# Altium PCB inverter_2EDF7275K.PcbDoc
Units mm, origin at the board's own origin, x right, y up, seen from the top; angles counter-clockwise.
Board outline 100 x 80.04 mm, 2 copper layers (Top Layer, Bottom Layer); 57 components, 34 nets, 190 pads, 17 vias.
Unrouted connection lines stored in the file: 42.
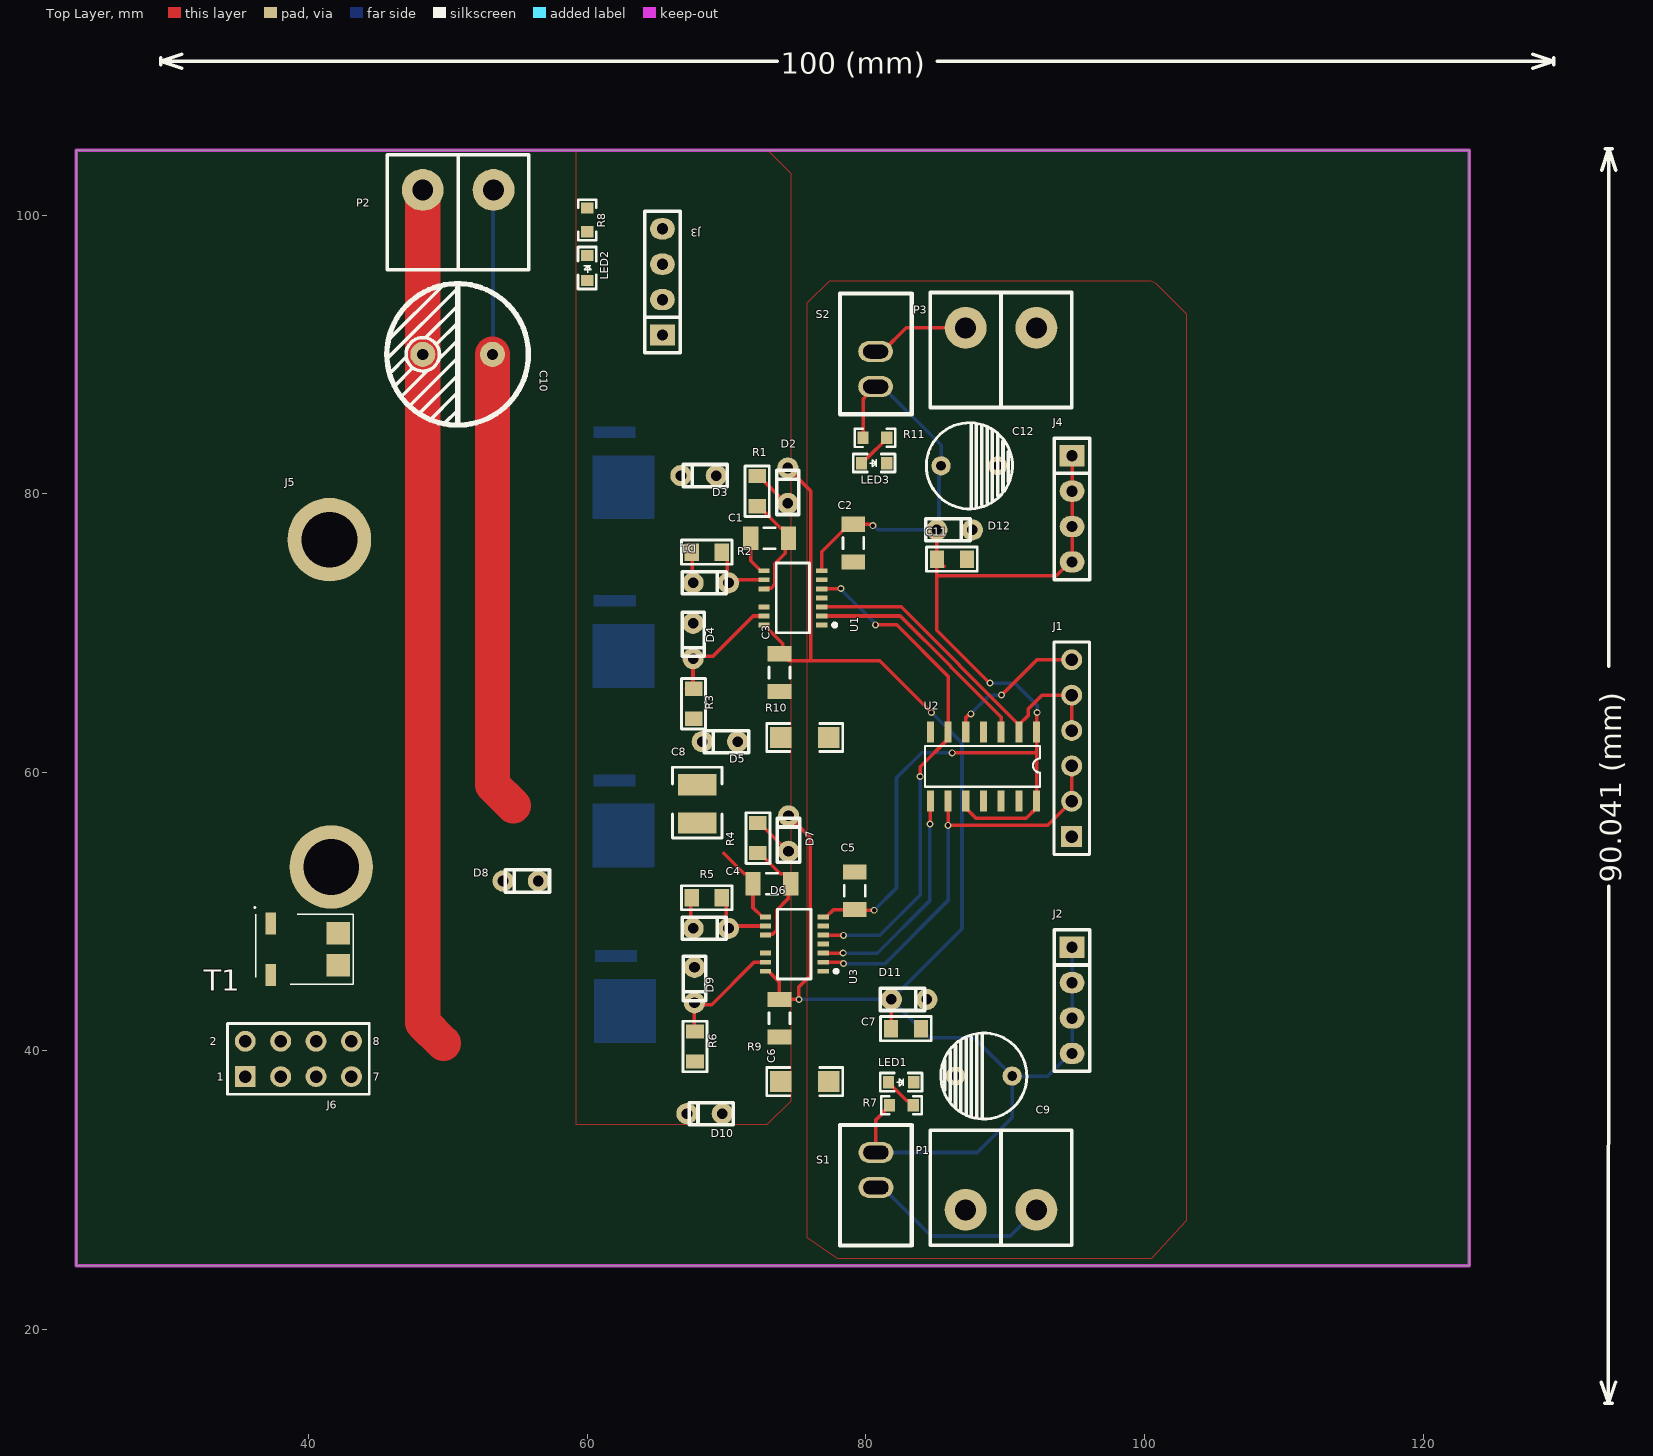
[diagram p0: Top Layer view]
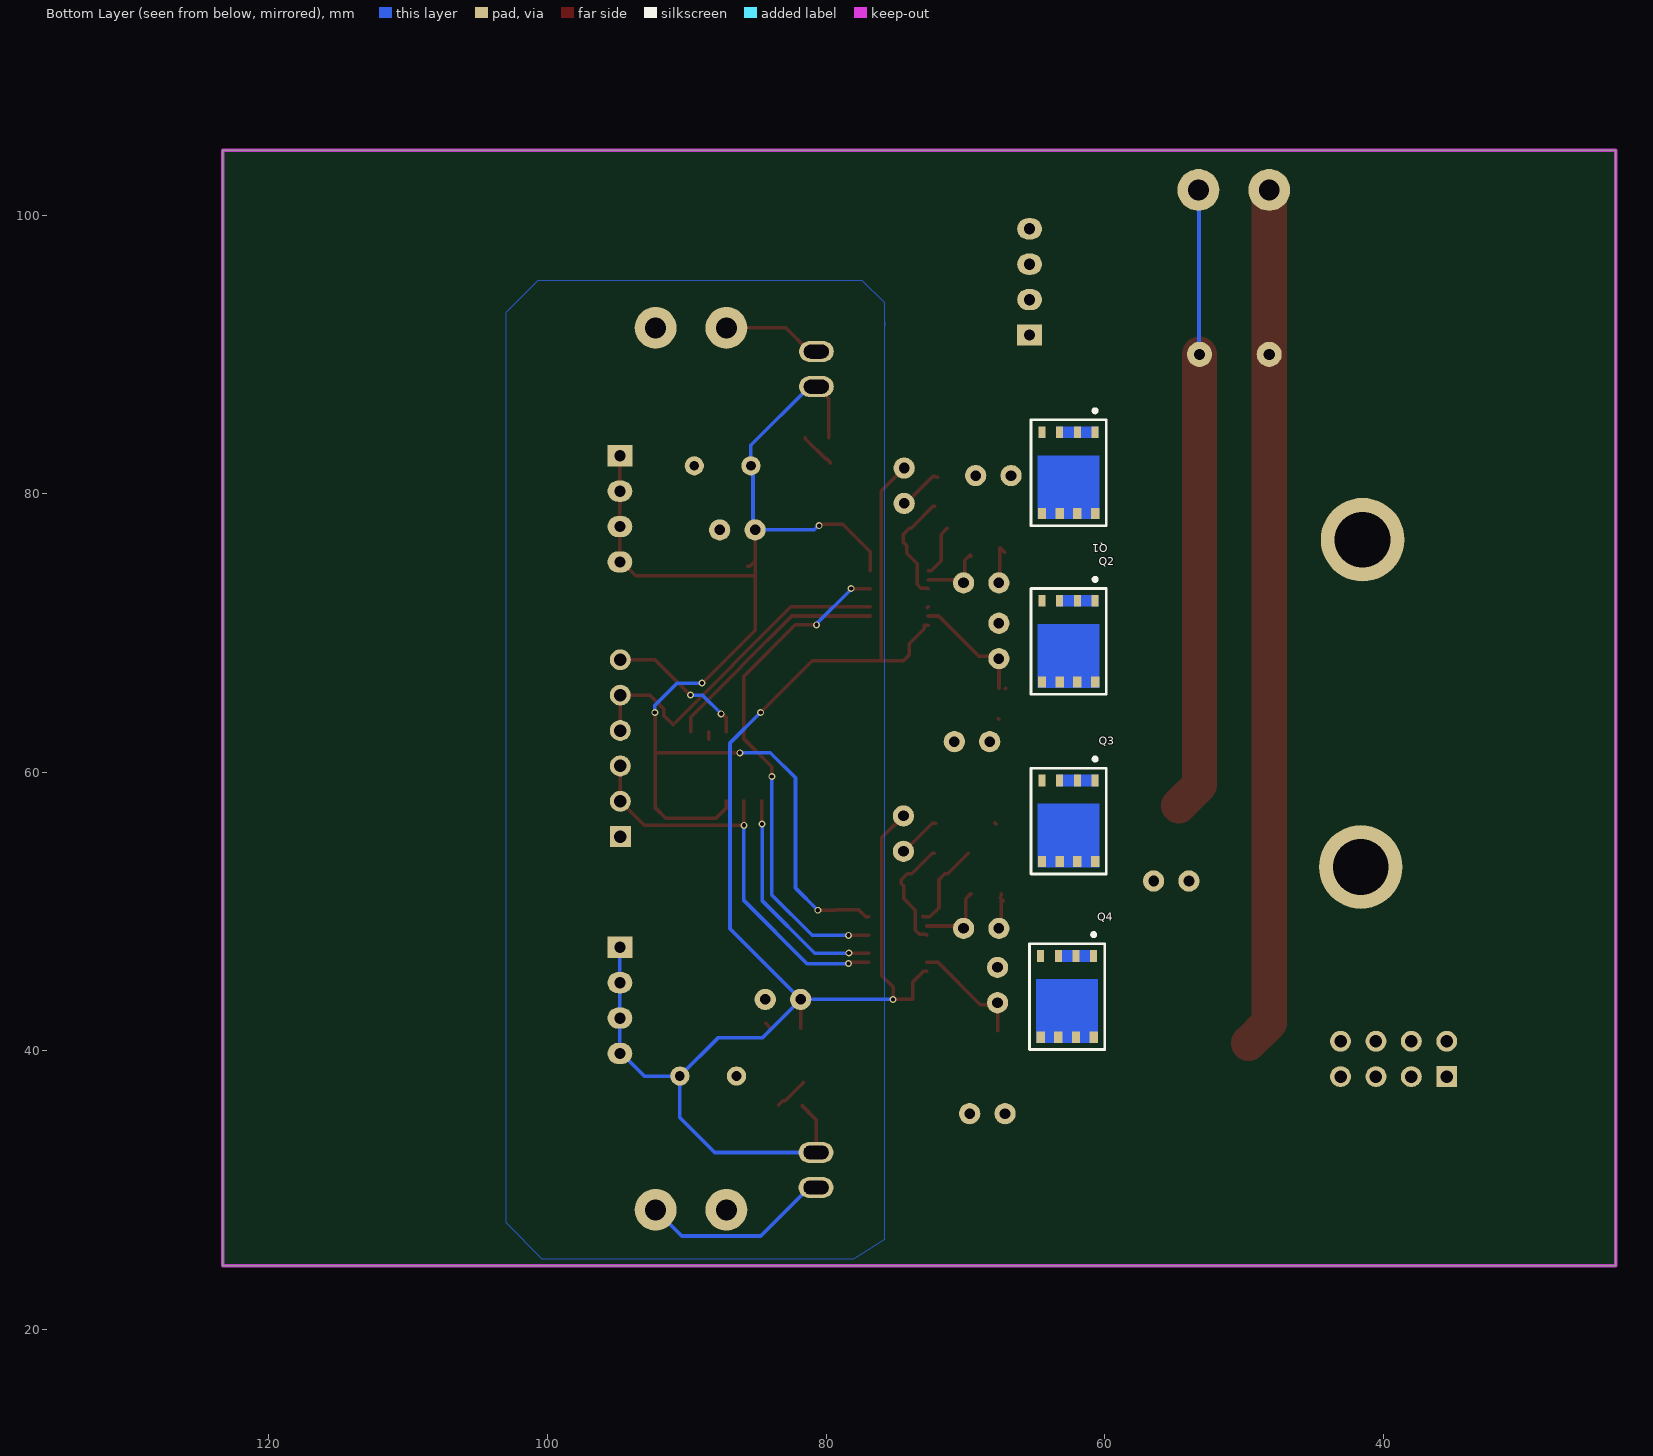
[diagram p1: Bottom Layer view, seen from below]
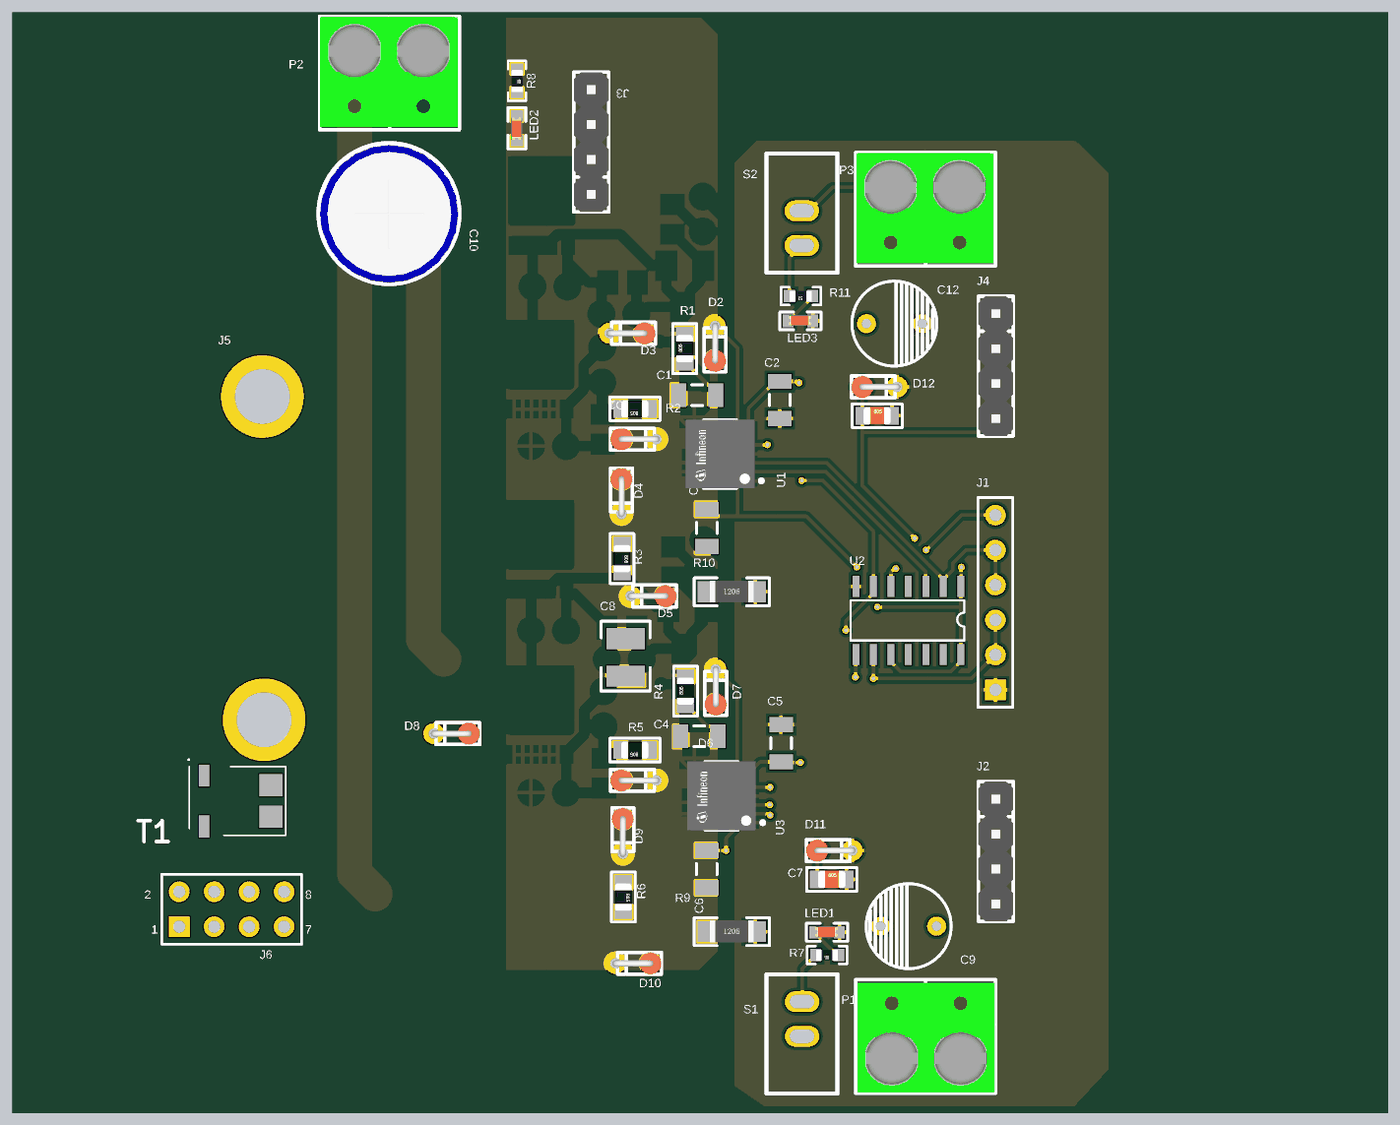
[diagram p2: 3D render of the assembled board from above, using the file's embedded part models]
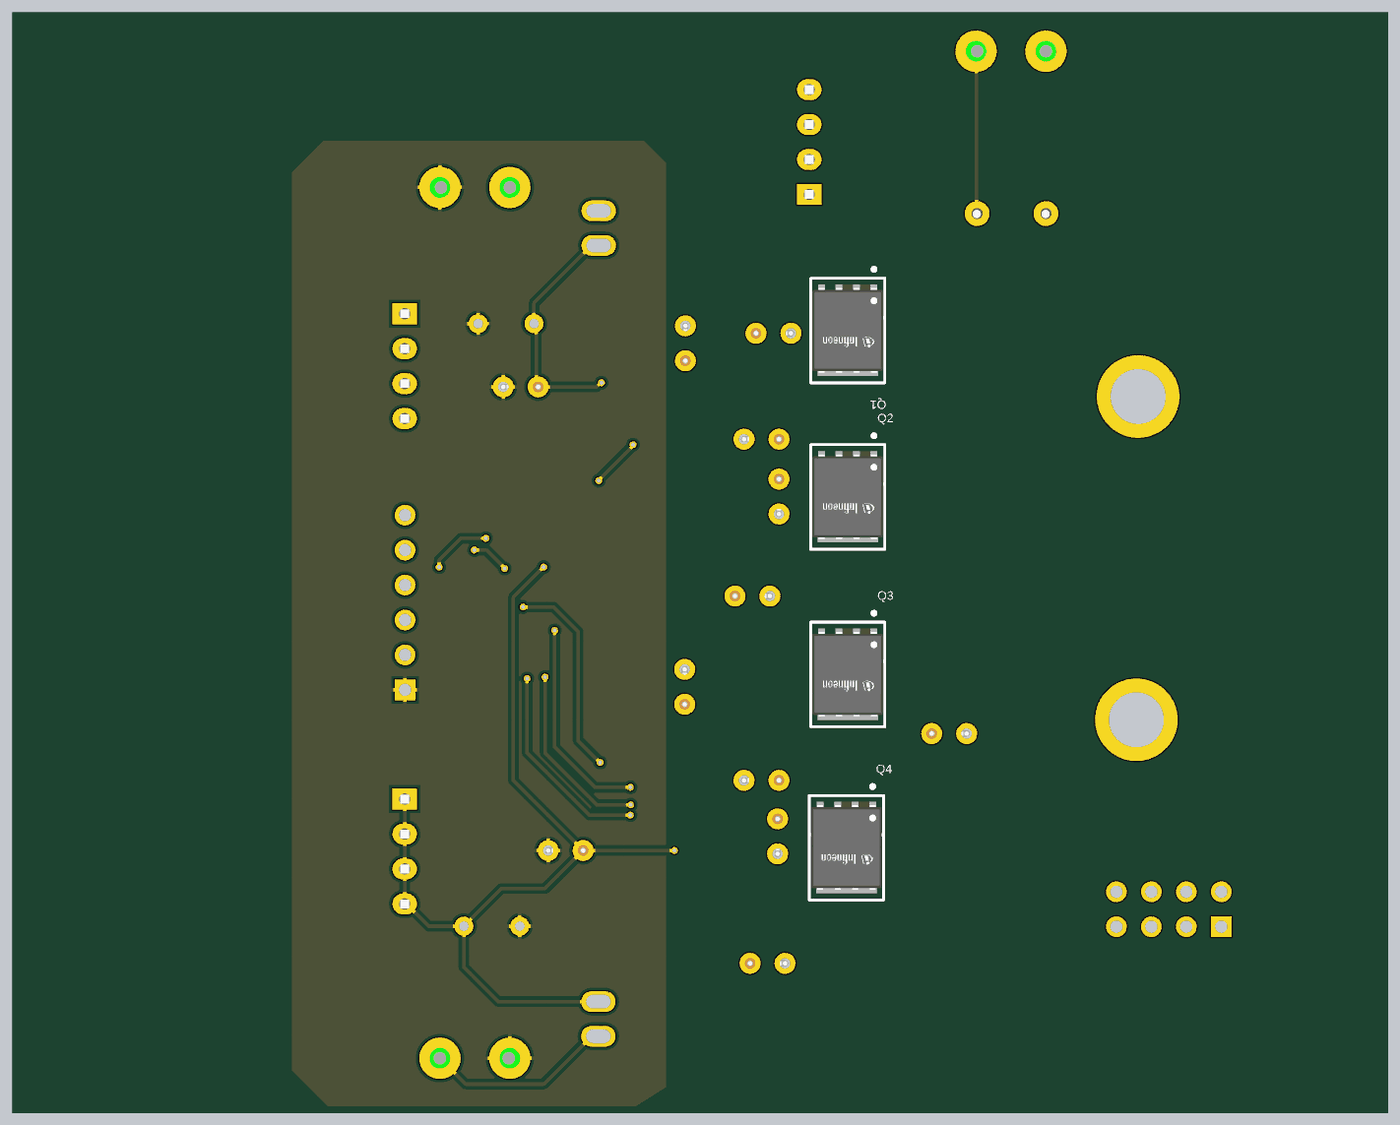
[diagram p3: 3D render of the assembled board from below, using the file's embedded part models]

## Layer stack, top to bottom
Top Solder: solder mask 0.0102, Solder Resist, Dk 3.5
Top Layer: signal copper 0.0356
Dielectric 1: dielectric 0.32, FR-4, Dk 4.8
Bottom Layer: signal copper 0.0356
Bottom Solder: solder mask 0.0102, Solder Resist, Dk 3.5

## Board outline
23.322,24.6 123.322,24.6 123.322,104.637 23.322,104.637

## Design rules (kind name [scope] priority, off if disabled: settings)
Clearance [All] p1: gap=0.254 ignorepadtopadclearanceinfootprint=FALSE except(0: Arc-Hole Track-Hole SMDPad-Hole THPad-Hole Via-Hole Fill-Hole Poly-Hole Region-Hole Text-Hole)
PolygonConnect [All] p1: connectstyle=Relief reliefconductorwidth=0.254 reliefentries=4 polygonreliefangle="90 Angle" airgapwidth=0.254
RoutingVias [All] p1: holewidth=0.711 width=1.27 viastyle="Through Hole" minholewidth=0.711 minwidth=1.27 maxholewidth=0.711 maxwidth=1.27
SolderMaskExpansion [All] p1: expansion=0.102 istentingtop=FALSE
Width Width_1 [All] p1: maxlimit=5 minlimit=0.254 preferedwidth=2.54 minimp=50.000000 maximp=50.000000 favimp=50.000000
Width [All] p2: maxlimit=0.254 minlimit=0.254 preferedwidth=0.254
30 further rules are at their usual default settings.

## Components (designator, comment, footprint, x,y, rotation, side; value= is the part's Value field where it differs from the comment)
C1 "Cap" C1206 73.1,76.8 r0 top value=0.1u
C2 "Cap" C1206 79.1,76.45 r270 top value=0.1u
C3 "Cap" C1206 73.8,67.15 r90 top value=0.1u
C4 "Cap" C1206 73.25,52 r0 top value=0.1u
C5 "Cap" C1206 79.2,51.5 r90 top value=0.1u
C6 "Cap" C1206 73.8,42.35 r90 top value=0.1u
C7 "Cap" 0805C 81.8,41.6 r0 top value=104
C8 "104" 1210 67.9,58.084 r90 top
C9 "Cap" CD6 90.5,38.2 r0 top value=470u
C10 "100UF" CE/10MM 53.2,90 r180 top
C11 "Cap" 0805C 85.1,75.3 r0 top value=104
C12 "Cap" CD6 85.4,82 r180 top value=470u
D1 "BYV26" BYV26 70.267,76.14 r180 top
D2 "BYV26" 1N4148_Stand 74.4,80.57 r270 top
D3 "1N4740" 1N4148_Stand 68,81.3 r0 top
D4 "BYV26" BYV26 70.14,68.033 r90 top
D5 "1N4740" 1N4148_Stand 69.53,62.2 r0 top
D6 "BYV26" BYV26 70.267,51.34 r180 top
D7 "BYV26" 1N4148_Stand 74.45,55.6 r270 top
D8 "1N4740" 1N4148_Stand 55.23,52.2 r0 top
D9 "BYV26" BYV26 70.24,43.333 r90 top
D10 "1N4740" 1N4148_Stand 68.43,35.5 r0 top
D11 "1N4742" 1N4148_Stand 83.1,43.7 r180 top
D12 "1N4684" 1N4148_Stand 86.37,77.4 r180 top
J1 "Header 6" HDR1X6 94.773,55.38 r90 top
J2 "CON4" SIP4 94.8,43.63 r270 top
J3 "CON4" SIP4 65.4,95.2 r90 top
J4 "CON4" SIP4 94.8,78.91 r270 top
J5 "COIL" COILNEW 42.389,101.084 r270 top
J6 "Header 4X2" HDR2X4 35.46,38.16 r0 top
LED1 "" 0603_LED 81.637,37.763 r0 top
LED2 "" 0603_LED 60,95.3 r90 top
LED3 "" 0603_LED 79.7,82.2 r0 top
P1 "+12V" 050-2 89.7,28.6 r180 top
P2 "POWER" 050-2new 29.023,102.435 r0 top
P3 "3V3" 050-2 89.7,91.9 r0 top
Q1 "BSC13DN30NSFD" IFX-PG-TDSON-8-V 62.6,81.5 r270 bottom
Q2 "BSC13DN30NSFD" IFX-PG-TDSON-8-V 62.6,69.4 r270 bottom
Q3 "BSC13DN30NSFD" IFX-PG-TDSON-8-V 62.6,56.5 r270 bottom
Q4 "BSC13DN30NSFD" IFX-PG-TDSON-8-V 62.7,43.9 r270 bottom
R1 "Res2" 0805R 72.2,79.1 r90 top value=2.2
R2 "Res2" 0805R 69.659,75.8 r180 top value=2.2
R3 "Res2" 0805R 67.638,66 r270 top value=2.2
R4 "Res2" 0805R 72.25,54.2 r90 top value=2.2
R5 "Res2" 0805R 69.659,51 r180 top value=2.2
R6 "Res2" 0805R 67.738,41.4 r270 top value=2.2
R7 "2K" 0603-R 83.825,35.6 r180 top
R8 "2K" 0603-R 60.5,100.925 r270 top
R9 "Res2" 1206R 73.9,37.8 r0 top value=0
R10 "Res2" 1206R 73.9,62.5 r0 top value=0
R11 "2K" 0603-R 81.925,83.5 r180 top
S1 "switch1" Switch_8.2*5.2 80.725,30.2 r0 top
S2 "switch1" Switch_8.2*5.2 80.7,90.2 r180 top
T1 "CU8965-ALC" CU8965ALD 39.7,47.3 r0 top
U1 "2EDF7275K" TFLGA65P500X500X106-14_13N-V 74.763,72.522 r180 top
U2 "74LS00" 74ls00 92.25,62.9 r270 top
U3 "2EDF7275K" TFLGA65P500X500X106-14_13N-V 74.863,47.672 r180 top

## Footprints (in the part's own frame and the unit in brackets; to place one, negate y for a bottom-side part, rotate by r counter-clockwise, add the part's x,y. Pads: shape width x height; smd on the part's side, far side on the other; paste and mask are expansions set on the pad)
1N4148_Stand [mil]
  round 60 hole 30: 1(-50,0) 2(50,0)
  silkscreen extent -44,-31 81,31, body extent -58,-32 82,32, height 186
050-2 [mm]
  round 3 hole 1.5: 1(-2.54,0) 2(2.54,0)
  silkscreen extent -5.08,-5.72 5.08,2.54, body extent -5.04,-5.5 4.96,2.5, height 11.2
050-2new [mm]
  round 3 hole 1.5: 1(24.257,-0.635) 2(19.177,-0.635)
  silkscreen extent 16.64,-6.35 26.8,1.91, body extent 16.68,-6.13 26.68,1.87, height 11.2
74ls00 [mil]
  rect 60x20 smd: 1(0,0) 2(0,-50) 3(0,-100) 4(0,-150) 5(0,-200) 6(0,-250) 7(0,-300) 8(195,-300) 9(195,-250) 10(195,-200) 11(195,-150) 12(195,-100) 13(195,-50) 14(195,0)
  silkscreen extent 40,-315 155,10
0603-R [mm]
  rect 0.8x0.9 smd: 1(0.425,-0.5) 2(2.125,-0.5)
  silkscreen extent -0.17,-1.15 2.73,0.15, body extent 0.5,-0.88 2.1,-0.08, height 0.3
0603_LED [mm]
  rect 0.8x0.9 smd: 1(0,0) 2(1.8,0)
  silkscreen extent -0.6,-0.65 2.4,0.65, body extent 0.05,-0.37 1.67,0.43, height 0.6
0805C [mil]
  rect 40x50 smd: 1(0,0) 2(85,0)
  silkscreen extent -29,-34 114,34, body extent 3,-25 82,25, height 30
0805R [mil]
  rect 40x50 smd: 1(0,0) 2(85,0)
  silkscreen extent -29,-34 114,34, body extent 3,-25 82,25, height 30
1206R [mil]
  rect 60x60 smd: 1(0,0) 2(135,0)
  silkscreen extent -40,-40 175,40, body extent 4,-30 130,33, height 24
1210 [mil]
  rect 60x110 smd: 1(-67.5,0) 2(40,0)
  silkscreen extent -110,-70 90,70
BYV26 [mil]
  round 60 hole 30: 1(105,100) 2(5,100)
  silkscreen extent 11,69 136,131, body extent -3,68 137,132, height 186
C1206 [mm] "Chip Capacitor, Body 3.2x1.6mm, IPC High Density"
  rect 1.1x1.7 smd: 1(-1.35,0) 2(1.35,0)
  silkscreen extent -0.4,-0.75 0.4,0.75, body extent -1.7,-0.9 1.7,0.9, height 1.3
CD6 [mm]
  round 1.38 hole 0.7: 1(0,0) 2(-4.064,0)
  silkscreen extent -5.12,-3.09 1.06,3.09
CE/10MM [mm]
  round 1.8 hole 0.8: 1(0,0) 2(5,0)
  silkscreen extent -2.58,-5.08 7.58,5.08, body extent -2.55,-5 7.5,5.05, height 16.53
COILNEW [mm]
  round 6 hole 4: 1(24.384,-0.889) 2(47.879,-0.762)
CU8965ALD [mm]
  rect 0.75x1.6 smd: 1(-2.425,1.85) 2(-2.425,-1.85)
  rect 1.7x1.6 smd: 3(2.425,-1.15) 4(2.425,1.15)
  silkscreen extent -3.6,-2.5 3.5,3.05, body extent 0,0 0,0
HDR1X6 [mm] "Connector; Header; 6 Position"
  rect 1.5x1.5 hole 0.9: 1(0,0)
  round 1.5 hole 0.9: 2(2.54,0) 3(5.08,0) 4(7.62,0) 5(10.16,0) 6(12.7,0)
  silkscreen extent -1.27,-1.27 13.97,1.27
HDR2X4 [mm] "Connector; Header; 4x2 Position"
  rect 1.5x1.5 hole 0.9: 1(0,0)
  round 1.5 hole 0.9: 2(0,2.54) 3(2.54,0) 4(2.54,2.54) 5(5.08,0) 6(5.08,2.54) 7(7.62,0) 8(7.62,2.54)
  silkscreen extent -1.27,-1.27 8.89,3.81
IFX-PG-TDSON-8-V [mm] "TDSON 8, 1.27mm pitch; 8 pin,5.90mm W X 5.15mm L X 1.10mm H body"
  rect 0.85x0.5 smd paste+0 mask+0: 1(-2.912,1.905) 2(-2.912,0.635) 3(-2.912,-0.635) 4(-2.912,-1.905)
  rect 0.8x0.6 smd paste+0 mask+0: 5(2.912,-1.905) 6(2.912,-0.635) 7(2.912,0.635) 8(2.912,1.905)
  Top Layer region: -3.337,2.156 -2.487,2.156 -2.487,-0.884 -3.337,-0.884
  Top Layer region: 3.312,2.205 -1.237,2.205 -1.237,-2.205 3.312,-2.205
  silkscreen extent -4.57,-2.7 3.8,2.7, body extent -3.09,-2.7 3.06,2.69, height 1.01
SIP4 [mil]
  rect 60x70 hole 32: 1(-150,0)
  oval 60x70 hole 32: 2(-50,0) 3(50,0) 4(150,0)
  silkscreen extent -200,-50 200,50, body extent -200,-50 200,50, height 336
Switch_8.2*5.2 [mm]
  oval 2.5x1.5 hole 1 slot 1.8 at 0 deg: 1(0,2.515) 2(0,0)
  silkscreen extent -2.59,-4.17 2.57,4.5
TFLGA65P500X500X106-14_13N-V [mm] "TFLGA,0.65mm pitch;13 pin,5.00mm W X 5.00mm L X 1.06mm H body (w/pullback leads)"
  rect 0.8x0.35 smd paste-0.8 mask+0: 1(-2.075,1.95) 2(-2.075,1.3) 3(-2.075,0.65) 4(-2.075,0) 5(-2.075,-0.65) 6(-2.075,-1.3) 7(-2.075,-1.95) 8(2.075,-1.95) 9(2.075,-1.3) 10(2.075,-0.65) 11(2.075,0.65) 12(2.075,1.3) 13(2.075,1.95)
  silkscreen extent -3.13,-2.5 1.2,2.5, body extent -2.5,-2.5 2.5,2.5, height 1.07

## Part data
C1 C2 C3 C4 C5 C6 C7 C9 C11 C12: "Capacitor", LatestRevisionDate=17-Jul-2002, LatestRevisionNote="Re-released for DXP Platform.", PackageDescription="Radial Cap, Thru-Hole; 2 Leads; 0.3 in Pin Spacing", PackageReference=RAD-0.3, Published=8-Jun-2000, Publisher="Altium Limited"
C8: library part CBB
C10: library part ELECTRO1, "电解电容"
D1 D2 D4 D6 D7 D9: library part "Diode 1N4007", "1 Amp General Purpose Rectifier", Code_JEDEC=DO-204-AL, ComponentLink1Description="Manufacturer Link", ComponentLink1URL=http://www.fairchildsemi.com/, ComponentLink2Description=Datasheet, ComponentLink2URL=http://www.fairchildsemi.com/ds/1N%2F1N4001.pdf, DatasheetVersion=1998, LatestRevisionDate=17-Jul-2002, LatestRevisionNote="Re-released for DXP Platform.", PackageDescription="Diode, Axial; Body 5.2 x 2.7 mm (LxDia. max), Lead Dia. 0.86 mm (max)", PackageReference=DO-41, PackageVersion=Aug-1999, Published=8-Jun-2000, Publisher="Altium Limited"
D3 D5 D8 D10 D11 D12: library part "D Zener", "Zener Diode", LatestRevisionDate=17-Jul-2002, LatestRevisionNote="Re-released for DXP Platform.", PackageDescription="Diode, Thru-Hole; 2 Leads; 0.7 in Pin Spacing", PackageReference=DIODE-0.7, Published=8-Jun-2000, Publisher="Altium Limited"
J1: "Header, 6-Pin", LatestRevisionDate=17-Jul-2002, LatestRevisionNote="Re-released for DXP Platform.", Publisher="Altium Limited"
J2 J3 J4: "Connector"
J5: library part CON2, "Connector"
J6: "Header, 4-Pin, Dual row", LatestRevisionDate=17-Jul-2002, LatestRevisionNote="Re-released for DXP Platform.", Publisher="Altium Limited"
LED1 LED2 LED3: library part LED2, "Typical RED, GREEN, YELLOW, AMBER GaAs LED", LatestRevisionDate=17-Jul-2002, LatestRevisionNote="Re-released for DXP Platform.", PackageDescription="SM LED; 2 Flat Leads", PackageReference=3.2X1.6X1.1, PackageVersion=Feb-2002, Published=8-Jun-2000, Publisher="Altium Limited"
P1 P3: library part POWER
Q1 Q2 Q3 Q4: "Insulated-Gate Field-Effect Transistor (IGFET), N-Channel, Enhancement, Body Diode, Pin 1 Source, 2 Source, 3 Source, 4 Gate, 5 Drain, 6 Drain, 7 Drain, 8 Drain, 8 Pins", Manufacturer="Infineon Technologies", Manufacturer Order Number=BSC13DN30NSFD, PackageReference=PG-TDSON-8-1
R1 R2 R3 R4 R5 R6 R9 R10: "Resistor", LatestRevisionDate=17-Jul-2002, LatestRevisionNote="Re-released for DXP Platform.", PackageDescription="Axial Device, Thru-Hole; 2 Leads; 0.4 in Pin Spacing", PackageReference=AXIAL-0.4, Published=8-Jun-2000, Publisher="Altium Limited"
R7 R8 R11: library part RES
T1: "Transformer", Manufacturer_Name=COILCRAFT, Datasheet Link=https://www.mouser.co.uk/datasheet/2/597/cu8965-774485.pdf, Height=3mm, Manufacturer_Part_Number=CU8965-ALC
U1 U3: "Dual-Channel, Functional and Reinforced Isolated MOSFET Gate-Driver", Alternate View=No, Multiple Parts=No, Symbol Type="Dual-Channel, Functional and Reinforced Isolated MOSFET Gate-Driver"

## Via types
v1: diameter 0.5, hole 0.3, Top Layer to Bottom Layer, 17 vias

## Nets (pads, with @x,y where several pads share a name; then routed paths per layer and width w, separated by ;. In a path a pad name is that pad's centre, name@x,y a point inside that pad or via, vN(x,y) a via of type N, cw(c..) or ccw(c..) an arc to the next point about the centre after c; other vN are vias at no path point)
+3V3: C2.1 C5.1 C11.1 C12.1 D12.2 J4.1 J4.2 J4.3 J4.4 R11.2 S2.1 U1.7 U2.1 U2.4 U2.10 U2.14 U3.7 | length 101.2
  Top Layer w0.254: U1.7 76.838,75.838 78.8,77.8 80.333,77.8 80.433,77.7 v1(80.5,77.7) ; U3.7 77.163,49.622 77.691,50.15 C5.1 79.25,50.1 v1(80.6,50.1) ; R11.2 79.8,86.785 79.962,86.947 S2.1@79.962,87.11 ; C12.1@85.314,82.086 C12.1 C12.1@85.4,81.695 ; D12.2@85.319,77.619 D12.2 C11.1 C11.1@85.1,75.173 ; 85.608,74.792 85.481,74.792 C11.1@85.1,75.173 ; v1(86.2,61.4) 92.2,61.4 92.25,61.45 U2.1 92.275,62.925 92.275,64.275 v1(92.3,64.3) ; U2.10 87.17,57.439 87.901,56.708 91.519,56.708 92.25,57.439 U2.14 92.25,61.4 ; U2.4@88.44,62.392 U2.4 ; v1(88.9,66.4) 85.1,70.2 85.1,74.1 ; J4.3@94.673,77.64 J4.3 ; J4.1 J4.2 J4.3 ; 85.1,74.1 93.673,74.1 94.673,75.1 J4.4 J4.3 ; 85.1,74.1 C11.1@85.1,75.173
  Bottom Layer w0.254: v1(80.5,77.7) 80.567,77.7 80.867,77.4 D12.2 85.25,77.55 85.25,81.85 C12.1 85.4,83.485 81.2,87.685 S2.1 ; v1(80.6,50.1) 82.2,51.7 82.2,59.6 84,61.4 v1(86.2,61.4) ; v1(88.9,66.4) 90.7,66.4 92.3,64.8 v1(92.3,64.3)
+12: C3.2 C6.2 C7.1 C9.1 D2.1 D7.1 D11.2 J2.1 J2.2 J2.3 J2.4 R7.2 S1.1 U1.13 U3.13 | length 121.5
  Top Layer w0.254: U1.13 72.913,70.572 72.961,70.524 72.961,70.299 74.027,69.233 74.027,68.423 74.45,68 76.1,68 ; U3.13 73.013,45.722 73.8,44.935 C6.2 v1(75.2,43.7) 75.2,44.6 76,45.4 76,55.32 D7.1 ; D2.1 76.05,80.19 76.05,68.05 76.1,68 ; S1.1 80.725,35.075 81.7,36.05 R7.2 ; C7.1@81.83,41.63 D11.2 ; v1(84.7,64.3) 81,68 76.1,68
  Bottom Layer w0.254: D2.1 D2.1@74.57,81.67 ; v1(75.2,43.7) D11.2 ; S1.1 87.985,32.715 90.5,35.229 C9.1 ; v1(84.7,64.3) 86.9,62.1 86.9,48.77 D11.2 ; J2.1 J2.2 J2.3 J2.4 94.673,39.82 93.053,38.2 C9.1 ; D11.2 84.594,40.936 87.764,40.936 C9.1
AGND: C2.2 C5.2 C7.2 C9.2 C11.2 C12.2 D11.1 D12.1 J1.1 LED1.2 LED3.2 P1.2 P3.2 R9.2 R10.2 U1.1 U1.4 U2.7 U3.1 U3.4 | length 0.6
  Top Layer w0.254: C7.2 C7.2@84.34,41.981 ; D11.1@84.34,43.67 D11.1
GND: C3.1 C6.1 C8.2 C10.2 D5.1 D10.1 J6.1 J6.3 J6.5 J6.7 J6.8 LED2.2 P2.2 Q2.1 Q2.2 Q2.3 Q4.1 Q4.2 Q4.3 R9.1 R10.1 U1.11 U3.11 | length 61.9
  Top Layer w0.254: U1.11 U1.11@72.736,71.824
  Top Layer w2.54: P2.2 C10.2 48.2,42.032 49.688,40.544
NetC1_1: C1.1 D3.1 J5.1 Q1.1 Q1.2 Q1.3 Q2.5 Q2.6 Q2.7 Q2.8 U1.8 | length 3.9
  Top Layer w0.254: D3.1@66.63,81.2 D3.1 ; C1.1@71.327,77.515 71.75,77.092 C1.1 71.75,75.185 72.463,74.472 U1.8
NetC1_2: C1.2 R1.1 U1.10 | length 8
  Top Layer w0.254: R1.1 72.327,79.1 73.904,77.523 74.027,77.523 74.45,77.1 C1.2 74.45,76.508 74.218,76.275 74.218,75.718 73.469,74.969 73.469,73.489 73.2,73.22 72.736,73.22 U1.10
NetC4_1: C4.1 D8.1 Q3.1 Q3.2 Q3.3 Q4.5 Q4.6 Q4.7 Q4.8 T1.3 U3.8 | length 6.4
  Top Layer w0.254: D8.1@53.96,51.8 D8.1@53.978,51.782 ; 69.8,54.2 71.277,52.723 71.477,52.723 71.9,52.3 C4.1 71.9,50.285 72.563,49.622 U3.8 73.013,49.622 U3.8@73.061,49.67
NetC4_2: C4.2 R4.1 U3.10 | length 8.1
  Top Layer w0.254: R4.1 72.377,54.2 73.854,52.723 74.177,52.723 74.6,52.3 C4.2 74.418,51.818 74.418,50.918 73.6,50.1 73.6,48.67 73.3,48.37 72.836,48.37 U3.10
NetD1_1: D1.1 D3.2 Q1.4 R2.2 | length 3.2
  Top Layer w0.254: R2.2@67.2,75.8 67.5,76.1 67.525,76.075 D1.1@67.525,73.3
NetD1_2: D1.2 R2.1 U1.9 | length 5.6
  Top Layer w0.254: R2.1@69.576,75.517 69.659,75.6 70.04,75.219 D1.2@70.04,73.42 ; D1.2@69.82,74 69.94,74.12 69.94,74.025 69.965,74 D1.2@70.309,74 ; D1.2@70.409,73.3 70.931,73.822 U1.9
NetD2_2: D2.2 R1.2 | length 3.5
  Top Layer w0.254: R1.2@71.984,81.17 72.111,81.17 R1.2 72.327,81.259 74.286,79.3 D2.2 D2.2@74.644,79.3
NetD4_1: D4.1 D5.2 Q2.4 R3.2 | length 0.1
  Top Layer w0.254: R3.2@67.597,63.8 R3.2
NetD4_2: D4.2 R3.1 U1.12 | length 9.1
  Top Layer w0.254: R3.1@67.094,66.044 R3.1@67.138,66 ; D4.2@67.094,68.33 69.03,68.33 71.922,71.222 U1.12 ; R3.1@67.594,66.044 D4.2@67.594,68.33
NetD6_1: D6.1 D8.2 Q3.4 R5.2 | length 2.3
  Top Layer w0.254: R5.2@67.3,50.8 R5.2@67.43,50.93 ; D6.1@67.43,49 R5.2@67.43,50.93 ; R5.2@67.43,51.162 R5.2@67.43,51.289 ; R5.2 R5.2@67.43,50.93
NetD6_2: D6.2 R5.1 U3.9 | length 5.6
  Top Layer w0.254: R5.1@69.6,51.3 69.97,50.93 D6.2@69.97,49 ; D6.2@69.97,48.2 70.043,48.2 70.815,48.972 U3.9
NetD7_2: D7.2 R4.2 | length 3.2
  Top Layer w0.254: R4.2@72.13,56.352 72.384,56.352 74.406,54.33 D7.2
NetD9_1: D9.1 D10.2 Q4.4 R6.2
NetD9_2: D9.2 R6.1 U3.12 | length 9.1
  Top Layer w0.254: D9.2@67.194,43.33 68.93,43.33 71.972,46.372 U3.12 ; R6.1@67.694,41.444 D9.2@67.694,43.73
NetJ1_2: J1.2 J1.3 U2.9 U3.2 | length 30.2
  Top Layer w0.254: U3.2 78.235,46.372 78.334,46.272 v1(78.401,46.272) ; U2.9 v1(85.9,56.2) 93.053,56.2 J1.2 J1.3
  Bottom Layer w0.254: v1(78.401,46.272) 81.372,46.272 85.9,50.8 v1(85.9,56.2)
NetJ1_4: J1.4 J1.5 U1.3 U2.2 | length 24.9
  Top Layer w0.254: U1.3 82.539,71.872 86.696,67.715 86.696,67.692 U2.2@90.801,63.587 ; U2.2@90.98,63.408 91.669,64.097 91.669,64.561 92.648,65.54 J1.5 J1.4
NetJ1_6: J1.6 U2.5 | length 10.3
  Top Layer w0.254: U2.5 87.185,62.915 87.185,63.938 87.4,64.153 87.484,64.153 v1(87.531,64.2) ; v1(89.74,65.54) 92.28,68.08 J1.6
  Bottom Layer w0.254: v1(87.531,64.2) 88.871,65.54 v1(89.74,65.54)
NetJ5_2: J5.2 T1.4
NetJ6_2: J6.2 T1.2
NetJ6_4: J6.4 T1.1
NetJ6_6: J6.6
NetLED1_1: LED1.1 R7.1 | length 2.5
  Top Layer w0.254: LED1.1 81.637,37.713 82.927,36.423 83.127,36.423 83.4,36.15 R7.1
NetLED2_1: LED2.1 R8.1
NetLED3_1: LED3.1 R11.1 | length 2.6
  Top Layer w0.254: LED3.1 79.7,82.25 79.973,82.523 80.073,82.523 81.5,83.95 R11.1
NetP1_1: P1.1 S1.2 | length 14.2
  Top Layer w0.254: S1.2 S1.2@81.225,30.2
  Bottom Layer w0.254: S1.2 81.225,30.2 84.706,26.719 90.359,26.719 P1.1
NetP3_1: P3.1 S2.2 | length 7.2
  Top Layer w0.254: S2.2 81.2,90.2 82.9,91.9 P3.1
NetU1_2: U1.2 U2.3 | length 17
  Top Layer w0.254: U1.2 82.471,71.222 86.088,67.604 86.088,67.581 89.706,63.964 89.706,62.904 U2.3
NetU1_5: U1.5 U2.6 U3.5 | length 36.4
  Top Layer w0.254: U1.5 76.852,73.186 78.186,73.186 v1(78.2,73.2) ; U3.5 76.949,48.311 78.389,48.311 v1(78.4,48.3) ; v1(80.7,70.591) 82.209,70.591 85.9,66.9 85.9,62.392 83.9,60.392 v1(83.9,59.7)
  Bottom Layer w0.254: v1(78.2,73.2) 78.2,73.145 80.7,70.645 v1(80.7,70.591) ; v1(78.4,48.3) 81,48.3 83.9,51.2 v1(83.9,59.7)
NetU2_8: U2.8 U3.3 | length 16.4
  Top Layer w0.254: U3.3 76.94,47.024 78.372,47.024 v1(78.374,47.026) ; v1(84.6,56.3) 84.615,56.315 84.615,57.932 U2.8
  Bottom Layer w0.254: v1(78.374,47.026) 80.826,47.026 84.6,50.8 v1(84.6,56.3)
POWER: C8.1 C10.1 J3.1 J3.2 J3.3 J3.4 P2.1 Q1.5 Q1.6 Q1.7 Q1.8 Q3.5 Q3.6 Q3.7 Q3.8 R8.2 | length 45
  Top Layer w0.254: C8.1@67.8,56.269 C8.1
  Top Layer w2.54: C10.1 53.2,82.3 53.2,59.097 54.688,57.609
  Bottom Layer w0.254: C10.1 53.24,90.04 53.24,101.76 P2.1
pads on no net: U1.6 U2.11 U2.12 U2.13 U3.6

## Polygon pours and split planes (outlines as drawn)
AGND on Top Layer "NONET_L01_P000" (solid, shelved, pour order 0): 75.8,60.2 75.8,75.8 75.8,84.6 75.8,93.7 77.4,95.3 100.5,95.3 100.8,95.1 103,92.9 103,27.8 100.5,25.1 78,25.1 75.8,26.6 75.8,30.8
GND on Top Layer "NONET_L01_P003" (solid, shelved, pour order 3): 73,104.6 74.6,103 74.6,36.4 72.9,34.7 59.2,34.7 59.2,104.552 59.248,104.6 72.2,104.6
AGND on Bottom Layer "NONET_L02_P001" (solid, shelved, pour order 1): 75.8,93.7 77.4,95.3 100.7,95.3 103,93 103,27.7 100.4,25.1 78.017,25.1 75.8,26.5 75.8,60.3 75.8,75.5 75.8,84.4 75.8,92.3 75.8,92

## Keep-outs
Keep-Out Layer:
  lines w0.254: 23.322,24.6 23.322,104.637 123.322,104.637 123.322,24.6 108.359,24.6 58.359,24.6 52.109,24.6 39.609,24.6 23.322,24.6

## Silkscreen, mask and mechanical layers (free items; w line width, h text height)
Top Overlay:
  lines w0.254: 29.383,110.783 29.383,111.291 ; 30.907,110.529 29.383,111.037 ; 30.907,111.545 29.383,111.037 ; 73.644,111.037 29.383,111.037 ; 85.122,111.037 129.383,111.037 ; 127.859,110.529 129.383,111.037 ; 127.859,111.545 129.383,111.037 ; 129.383,110.783 129.383,111.291 ; 132.792,16.224 133.3,14.7 ; 132.813,103.217 133.322,104.741 ; 133.046,14.7 133.554,14.7 ; 133.068,104.741 133.576,104.741 ; 133.309,51.823 133.3,14.7 ; 133.313,67.617 133.322,104.741 ; 133.808,16.224 133.3,14.7 ; 133.829,103.217 133.322,104.741
  text "100 (mm)" at 73.898,110.123 h1.52
  text "90.041 (mm)" at 134.223,52.077 h1.52 r89.99

## Text inside footprints (layer, text, board x,y; h text height)
J6: Top Overlay "2" at 32.92,40.192 h1; Top Overlay "1" at 33.428,37.652 h1; Top Overlay "7" at 44.604,37.652 h1; Top Overlay "8" at 44.604,40.192 h1